# Altium PCB EnvUnitPCB.PcbDoc (part 2 of 4)
Units mm, origin at the board's own origin, x right, y up, seen from the top; angles counter-clockwise.
Board outline 110.5 x 67 mm, 4 copper layers (TOP, GND, VCC, BOT), stack 1.586 mm thick; 184 components, 135 nets, 655 pads, 1338 vias.
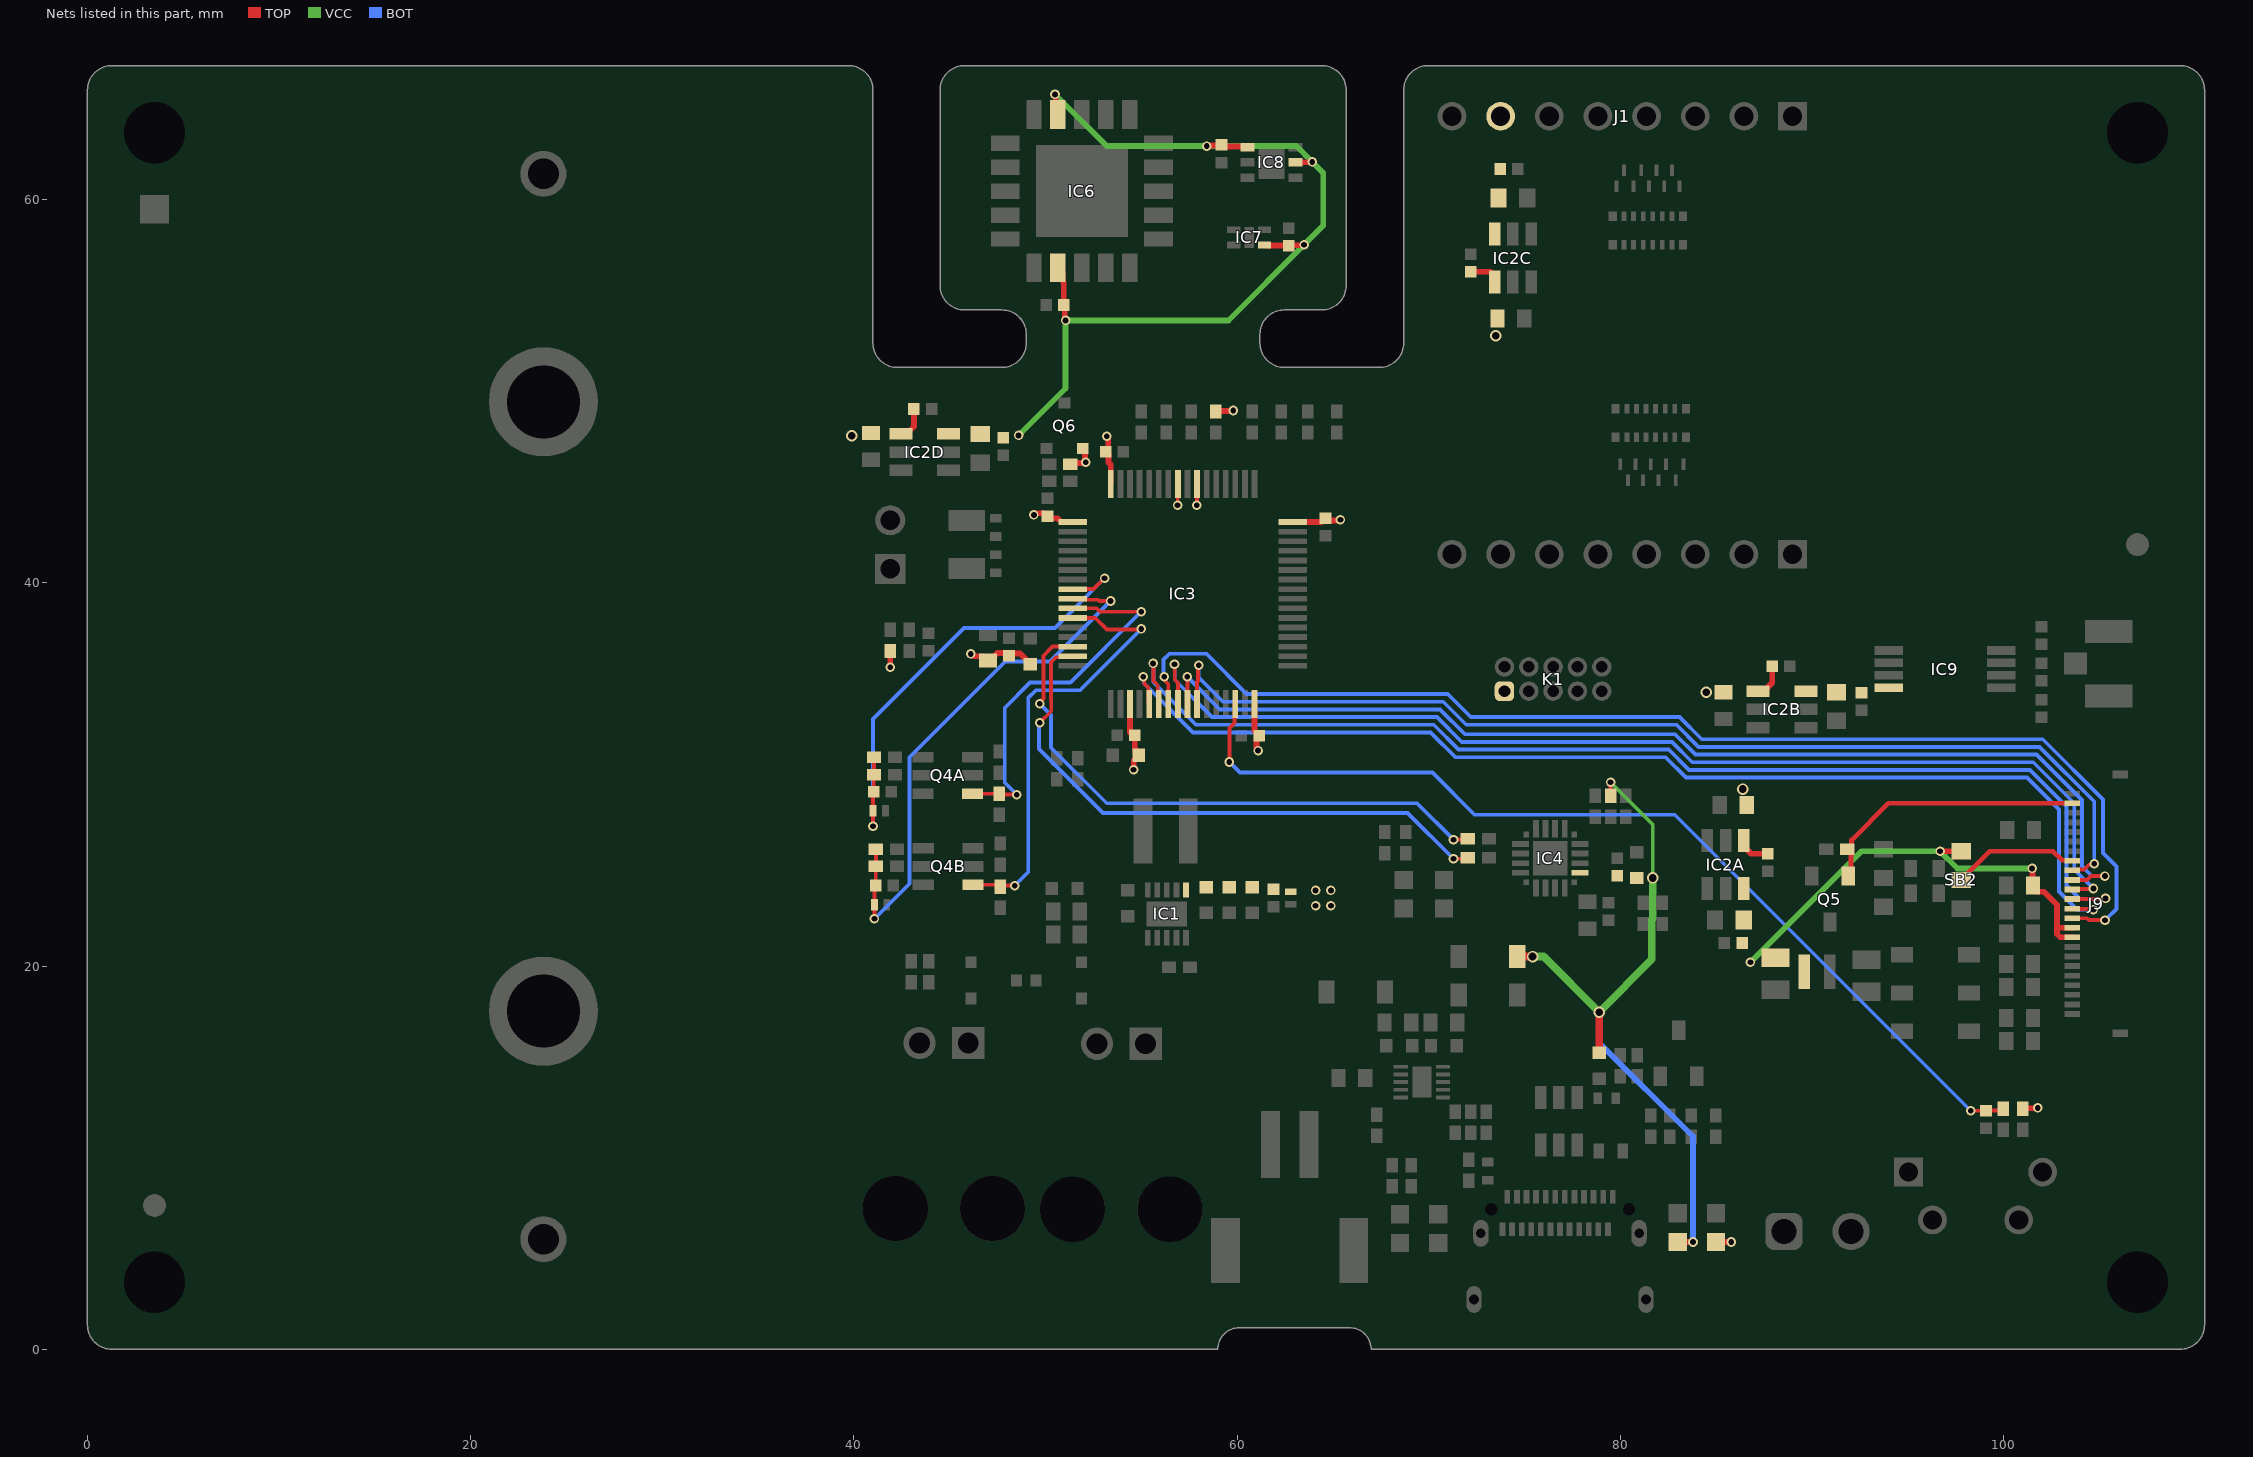
[diagram p4: the nets of this part, all layers, seen from the top]

## Part data
*BM1: library part MCH_00111, Manufacturer=LE, Active=1, Autor=JA, Cat1=Badmark, ComponentLink1Description="Manufacturer Web", ComponentLink1URL=http://www.logicelements.cz, Count=0, Designer=Krahulec, Generic_replacement=No, Jablotron_Price=0, LastRevisionDate=14.5.2018, LE_Price=0.000000, Librarian=Krahulec, Location=LE, PartNumber=MCH_00111, RoHS=1, Sourcing=None, Technology=NOP
*FD1 *FD2: library part MCH_00028, "Fiducial", Manufacturer=LE, Temperature_Max=125, Temperature_Min=-55, TemperatureRange=Military, Active=1, Autor="Lukas Krahulec", Cat1=Fiducial, ComponentLink1Description="Manufacturer Web", ComponentLink1URL=http://www.logicelements.cz, Designer="Lukas Krahulec", FIT=0, Generic_replacement=No, Jablotron_Price=0, LatestRevisionDate=25.6.2018, LE_Price=0, Librarian="Lukas Krahulec", Location=LE, PartNumber=MCH_00028, RoHS=1, Sourcing=None, Storage_Count=0, Technology=NOP
BT1: "Battery", Manufacturer_Name=Bulgin, Mouser Part Number=122-BX0036, Arrow Part Number=BX0036, Arrow Price/Stock=https://www.arrow.com/en/products/bx0036/bulgin-components-plc, Datasheet Link=https://www.bulgin.com/pdf/pdf.php?sku=BX0036, Height=25.1mm, Manufacturer_Part_Number=BX0036, Mouser Price/Stock=https://www.mouser.co.uk/ProductDetail/Bulgin/BX0036?qs=mZhjc5a7U8wkz32kfV3vfA%3D%3D
C1 C8A C8B C8C C8D C10 C11 C12 C13 C14 C18 C20 C21 C23 C24 C25 C29 C30 C39A C39B: library part GRM155R61A104KA01D, "Capacitor", Manufacturer_Name="Murata Electronics", Mouser Part Number=81-GRM155R61A104KA01, Arrow Part Number=GRM155R61A104KA01D, Arrow Price/Stock=https://www.arrow.com/en/products/grm155r61a104ka01d/murata-manufacturing?utm_currency=USD&region=europe, Datasheet Link=https://search.murata.co.jp/Ceramy/image/img/A01X/G101/ENG/GRM155R61A104KA01-02A.pdf, Height=0.7mm, Manufacturer_Part_Number=GRM155R61A104KA01D, Mouser Price/Stock=https://www.mouser.co.uk/ProductDetail/Murata-Electronics/GRM155R61A104KA01D?qs=5bAuhL3RhmNZw0v59AqOJA%3D%3D
C2 C3 C4 C5 C9 C19 C31 C34 C36: library part GRM188R61E106KA73D, "Capacitor", Manufacturer_Name="Murata Electronics", Mouser Part Number=81-GRM188R61E106KA3D, Arrow Part Number=GRM188R61E106KA73D, Arrow Price/Stock=https://www.arrow.com/en/products/grm188r61e106ka73d/murata-manufacturing?region=nac, Datasheet Link=https://search.murata.co.jp/Ceramy/image/img/A01X/G101/ENG/GRM188R61E106KA73-01A.pdf, Height=0.9mm, Manufacturer_Part_Number=GRM188R61E106KA73D, Mouser Price/Stock=https://www.mouser.co.uk/ProductDetail/Murata-Electronics/GRM188R61E106KA73D?qs=5aG0NVq1C4z8ebxPkQZf9A%3D%3D
C6A C6B C6C C6D C17: library part GRM188R61A105KA61D, "Capacitor", Manufacturer_Name="Murata Electronics", Mouser Part Number=81-GRM39R105K10, Arrow Part Number=GRM188R61A105KA61D, Arrow Price/Stock=https://www.arrow.com/en/products/grm188r61a105ka61d/murata-manufacturing?region=nac, Datasheet Link=https://search.murata.co.jp/Ceramy/image/img/A01X/G101/ENG/GRM188R61A105KA61-01A.pdf, Height=0.9mm, Manufacturer_Part_Number=GRM188R61A105KA61D, Mouser Price/Stock=https://www.mouser.co.uk/ProductDetail/Murata-Electronics/GRM188R61A105KA61D?qs=LlFn95tWfDgsujID1PD8Jw%3D%3D
C7A C7B C7C C7D: library part GRM155R61A102KA01D, "Capacitor", Manufacturer_Name="Murata Electronics", Mouser Part Number=81-GRM155R61A102KA1D, Arrow Part Number=GRM155R61A102KA01D, Arrow Price/Stock=https://www.arrow.com/en/products/grm155r61a102ka01d/murata-manufacturing?region=nac, Datasheet Link=https://search.murata.co.jp/Ceramy/image/img/A01X/G101/ENG/GRM155R61A102KA01-01A.pdf, Height=0.7mm, Manufacturer_Part_Number=GRM155R61A102KA01D, Mouser Price/Stock=https://www.mouser.co.uk/ProductDetail/Murata-Electronics/GRM155R61A102KA01D?qs=y02iAgv9n635dgph15ru9A%3D%3D
C15 C16: library part GCM1555C1H6R8BA16J, "Capacitor", Manufacturer_Name="Murata Electronics", Mouser Part Number=81-GCM1555C1H6R8BA6J, Datasheet Link=https://search.murata.co.jp/Ceramy/image/img/A01X/G101/ENG/GCM1555C1H6R8BA16-01A.pdf, Height=0.55mm, Manufacturer_Part_Number=GCM1555C1H6R8BA16J, Mouser Price/Stock=https://www.mouser.co.uk/ProductDetail/Murata-Electronics/GCM1555C1H6R8BA16J?qs=QzBtWTOodeUHvskaC%252BV70A%3D%3D
C22 C32 C33 C35 C37 C38: library part GRM188R61E475KE11J, "Capacitor", Manufacturer_Name="Murata Electronics", Mouser Part Number=81-GRM188R61E475KE1J, Arrow Part Number=GRM188R61E475KE11J, Arrow Price/Stock=https://www.arrow.com/en/products/grm188r61e475ke11j/murata-manufacturing, Datasheet Link=https://search.murata.co.jp/Ceramy/image/img/A01X/G101/ENG/GRM188R61E475KE11-01A.pdf, Height=0.9mm, Manufacturer_Part_Number=GRM188R61E475KE11J, Mouser Price/Stock=https://www.mouser.co.uk/ProductDetail/Murata-Electronics/GRM188R61E475KE11J?qs=hNud%2FORuBR3%2Fa9GLJFT8KA%3D%3D
C26 C27 C28: library part GRM1555C2A4R7WA01D, "Capacitor", Manufacturer_Name="Murata Electronics", Mouser Part Number=81-GRM1555C2A4R7WA1D, Datasheet Link=https://search.murata.co.jp/Ceramy/image/img/A01X/G101/ENG/GRM1555C2A4R7WA01-01A.pdf, Height=0.7mm, Manufacturer_Part_Number=GRM1555C2A4R7WA01D, Mouser Price/Stock=https://www.mouser.com/Search/Refine.aspx?Keyword=81-GRM1555C2A4R7WA1D
C40 C41: library part GRM21BR61H475KE51L, "Capacitor", Manufacturer_Name="Murata Electronics", Mouser Part Number=81-GRM21BR61H475KE1L, Arrow Part Number=GRM21BR61H475KE51L, Arrow Price/Stock=https://www.arrow.com/en/products/grm21br61h475ke51l/murata-manufacturing?region=nac, Datasheet Link=https://search.murata.co.jp/Ceramy/image/img/A01X/G101/ENG/GRM21BR61H475KE51-01A.pdf, Height=1.45mm, Manufacturer_Part_Number=GRM21BR61H475KE51L, Mouser Price/Stock=https://www.mouser.co.uk/ProductDetail/Murata-Electronics/GRM21BR61H475KE51L?qs=eeBpzGFlv%252B%252BOtLzDC1PY6Q%3D%3D
C42 C43 C44 C45 C46 C47 C48 C49: library part GRT188R61H105KE13D, "Capacitor", Manufacturer_Name="Murata Electronics", Mouser Part Number=81-GRT188R61H105KE3D, Arrow Part Number=GRT188R61H105KE13D, Arrow Price/Stock=https://www.arrow.com/en/products/grt188r61h105ke13d/murata-manufacturing?region=nac, Datasheet Link=https://search.murata.co.jp/Ceramy/image/img/A01X/G101/ENG/GRT188R61H105KE13-01A.pdf, Height=0.9mm, Manufacturer_Part_Number=GRT188R61H105KE13D, Mouser Price/Stock=https://www.mouser.co.uk/ProductDetail/Murata-Electronics/GRT188R61H105KE13D?qs=drgMNd%252BkGPNIxxtJByMGCg%3D%3D
C50 C51: library part GRM155R71H103KA88D, "Capacitor", Manufacturer_Name="Murata Electronics", Mouser Part Number=81-GRM155R71H103KA8D, Arrow Part Number=GRM155R71H103KA88D, Arrow Price/Stock=https://www.arrow.com/en/products/grm155r71h103ka88d/murata-manufacturing?utm_currency=USD&region=nac, Datasheet Link=https://search.murata.co.jp/Ceramy/image/img/A01X/G101/ENG/GRM155R71H103KA88-01A.pdf, Height=0.33mm, Manufacturer_Part_Number=GRM155R71H103KA88D, Mouser Price/Stock=https://www.mouser.co.uk/ProductDetail/Murata-Electronics/GRM155R71H103KA88D?qs=Dfh4SrgScWxOVlCuzd3ZyQ%3D%3D
CN1: library part MCD-03232, "USB_TypeC, 24 pins, RA, SMD, T=2.96mm (USB Certified 3.1)", Manufacturer="AMPHENOL ICC", Manufacturer_Part_Number=12401826E412A, Component_Country_Of_Origin=China°, ComponentLink1URL=http://tunmcdsvn.tun.st.com/Component_Documentation_Library/Trunk/Connector/AMPHEMOL_ICC_12401826E412A, ID=5348, Internal_Part_Number=MCD-03232, Order_Code_Digikey=12401826E412ATR-ND, Order_Code_Farnell=3727763, Order_Code_RS=N/A, Part_Preference=Recommended, Part_Type=Connector, ShowFields=YES, Status=Checked
D1 D11A D11B: "Diode ESD (Uni-directional)", Manufacturer_Name=LITTELFUSE, Mouser Part Number=576-SP3205-01ETG, Arrow Part Number=SP3205-01ETG, Arrow Price/Stock=https://www.arrow.com/en/products/sp3205-01etg/littelfuse?utm_currency=USD&region=nac, Datasheet Link=https://4donline.ihs.com/images/VipMasterIC/IC/LFSI/LFSI-S-A0010724013/LFSI-S-A0010724013-1.pdf?hkey=6D3A4C79FDBF58556ACFDE234799DDF0, Height=0.55mm, Manufacturer_Part_Number=SP3205-01ETG, Mouser Price/Stock=https://www.mouser.co.uk/ProductDetail/Littelfuse/SP3205-01ETG?qs=vHuUswq2%252BswfNhVD4WkB%252BQ%3D%3D
D2 D3: "TVS Diode (Uni-directional)", Manufacturer_Name=SEMTECH, Mouser Part Number=947-RCLAMP3328P.TZT, Arrow Part Number=RCLAMP3328P.TZT, Arrow Price/Stock=https://www.arrow.com/en/products/rclamp3328p.tzt/semtech?utm_currency=USD&region=europe, Datasheet Link=https://media.digikey.com/pdf/Data%20Sheets/Semtech%20PDFs/RCLAMP3328P.pdf, Height=0.525mm, Manufacturer_Part_Number=RCLAMP3328P.TZT, Mouser Price/Stock=https://www.mouser.co.uk/ProductDetail/Semtech/RCLAMP3328P.TZT?qs=rBWM4%252BvDhIeqoxUfuQEPWg%3D%3D
D6: "TVS Diode (Uni-directional)", Manufacturer_Name=STMicroelectronics, Mouser Part Number=511-ESDA25P35-1U1M, Arrow Part Number=ESDA25P35-1U1M, Arrow Price/Stock=https://www.arrow.com/en/products/esda25p35-1u1m/stmicroelectronics?utm_currency=USD&region=europe, Datasheet Link=https://www.st.com/resource/en/datasheet/esda25p35-1u1m.pdf, Height=0.6mm, Manufacturer_Part_Number=ESDA25P35-1U1M, Mouser Price/Stock=https://www.mouser.co.uk/ProductDetail/STMicroelectronics/ESDA25P35-1U1M?qs=aVyJF2WnouQUWqgNP85ZrA%3D%3D
D8 D9: "Schottky Diode", Manufacturer_Name="ROHM Semiconductor", Mouser Part Number=755-RB161MM-20TR, Datasheet Link=https://fscdn.rohm.com/en/products/databook/datasheet/discrete/diode/schottky_barrier/rb161mm-20tr-e.pdf, Height=0.9mm, Manufacturer_Part_Number=RB161MM-20TR, Mouser Price/Stock=https://www.mouser.co.uk/ProductDetail/ROHM-Semiconductor/RB161MM-20TR?qs=pXoXL5qUNJ0AtQ2ZS1W0NA%3D%3D
D10: "Schottky Diode", Manufacturer_Name="ROHM Semiconductor", Mouser Part Number=755-RB168MM-40TFTR, Datasheet Link=https://www.rohm.com/products/diodes/schottky-barrier-diodes/ultra-low-ir/rb168mm-40tf-product#productDetail, Height=0.9mm, Manufacturer_Part_Number=RB168MM-40TFTR, Mouser Price/Stock=https://www.mouser.co.uk/ProductDetail/ROHM-Semiconductor/RB168MM-40TFTR?qs=4v%252BiZTmLVHGRj2i7xya%2FtQ%3D%3D
D12 D13 D14: "Diode", Manufacturer_Name=onsemi, Mouser Part Number=863-MBR0530T1G, Arrow Part Number=MBR0530T1G, Arrow Price/Stock=https://www.arrow.com/en/products/mbr0530t1g/on-semiconductor?utm_currency=USD&region=europe, Datasheet Link=https://www.onsemi.com/pub/Collateral/MBR0530T1-D.PDF, Height=1.35mm, Manufacturer_Part_Number=MBR0530T1G, Mouser Price/Stock=https://www.mouser.co.uk/ProductDetail/onsemi/MBR0530T1G?qs=3JMERSakeboS%2FFOxJUMWeg%3D%3D
FB1 FB2: library part BLM18SG330SN1D, "Ferrite Bead", Manufacturer_Name="Murata Electronics", Mouser Part Number=81-BLM18SG330SN1D, Arrow Part Number=BLM18SG330SN1D, Arrow Price/Stock=https://www.arrow.com/en/products/blm18sg330sn1d/murata-manufacturing, Datasheet Link=http://www.murata.com/~/media/webrenewal/support/library/catalog/products/emc/emifil/c31e.ashx?la=en-gb, Height=0.95mm, Manufacturer_Part_Number=BLM18SG330SN1D, Mouser Price/Stock=https://www.mouser.co.uk/ProductDetail/Murata-Electronics/BLM18SG330SN1D?qs=7EBvPakHacUT88safgvlfQ%3D%3D
IC1: "Integrated Circuit", Manufacturer_Name="Texas Instruments", Mouser Part Number=595-TPS63900DSKR, Arrow Part Number=TPS63900DSKR, Arrow Price/Stock=https://www.arrow.com/en/products/tps63900dskr/texas-instruments?utm_currency=USD&region=nac, Datasheet Link=https://www.ti.com/lit/gpn/tps63900?HQS=ti-null-null-sf-df-pf-sep-wwe&DCM=yes, Height=0.8mm, Manufacturer_Part_Number=TPS63900DSKR, Mouser Price/Stock=https://www.mouser.co.uk/ProductDetail/Texas-Instruments/TPS63900DSKR?qs=zW32dvEIR3tSAmS5hXaH1Q%3D%3D
IC2A IC2B IC2C IC2D: "Integrated Circuit", Manufacturer_Name="Texas Instruments", Mouser Part Number=595-TPS22917DBVT, Arrow Part Number=TPS22917DBVT, Arrow Price/Stock=https://www.arrow.com/en/products/tps22917dbvt/texas-instruments?region=nac, Datasheet Link=http://www.ti.com/lit/gpn/TPS22917, Height=1.45mm, Manufacturer_Part_Number=TPS22917DBVT, Mouser Price/Stock=https://www.mouser.co.uk/ProductDetail/Texas-Instruments/TPS22917DBVT?qs=r5DSvlrkXmJUT8ENVsEqXw%3D%3D
IC3: "Integrated Circuit", Manufacturer_Name=STMicroelectronics, Datasheet Link=https://www.st.com/resource/en/datasheet/stm32u073cc.pdf, Height=1.6mm, Manufacturer_Part_Number=STM32U073RCT6
IC4: "Integrated Circuit", Manufacturer_Name="Silicon Labs", Mouser Part Number=634-CP2102NA02QFN20R, Arrow Part Number=CP2102N-A02-GQFN20R, Arrow Price/Stock=https://www.arrow.com/en/products/cp2102n-a02-gqfn20r/silicon-labs?utm_currency=USD&region=nac, Datasheet Link=https://www.silabs.com/documents/public/data-sheets/cp2102n-datasheet.pdf, Height=0.8mm, Manufacturer_Part_Number=CP2102N-A02-GQFN20R, Mouser Price/Stock=https://www.mouser.co.uk/ProductDetail/Silicon-Labs/CP2102N-A02-GQFN20R?qs=u16ybLDytRbf2uwPkMBdUg%3D%3D
IC5: "Integrated Circuit", Manufacturer_Name=STMicroelectronics, Mouser Part Number=511-USBLC6-2SC6, Arrow Part Number=USBLC6-2SC6, Arrow Price/Stock=https://www.arrow.com/en/products/usblc6-2sc6/stmicroelectronics?utm_currency=USD&region=europe, Datasheet Link=http://www.st.com/st-web-ui/static/active/en/resource/technical/document/datasheet/CD00050750.pdf, Height=1.45mm, Manufacturer_Part_Number=USBLC6-2SC6, Mouser Price/Stock=https://www.mouser.co.uk/ProductDetail/STMicroelectronics/USBLC6-2SC6?qs=po45yt2pPpu%2FhNIlwQdTlg%3D%3D
IC6: "Integrated Circuit", Manufacturer_Name=Sensirion, Mouser Part Number=403-SCD41-D-R2, Arrow Part Number=SCD41-D-R2, Arrow Price/Stock=https://www.arrow.com/en/products/scd41-d-r2/sensirion-ag?region=nac, Datasheet Link=https://cz.mouser.com/datasheet/2/682/Sensirion_CO2_Sensors_SCD4x_Datasheet-2010009.pdf, Height=6.8mm, Manufacturer_Part_Number=SCD41-D-R2, Mouser Price/Stock=https://www.mouser.co.uk/ProductDetail/Sensirion/SCD41-D-R2?qs=HBWAp0VN4Ri4o7ei4T3s0g%3D%3D
IC7: "Integrated Circuit", Manufacturer_Name=Sensirion, Mouser Part Number=403-SHT40-AD1B-R2, Arrow Part Number=SHT40-AD1B-R2, Arrow Price/Stock=https://www.arrow.com/en/products/sht40-ad1b-r2/sensirion-ag?utm_currency=USD&region=nac, Datasheet Link=https://www.mouser.dk/datasheet/2/682/Sensirion_10272020_Datasheet_SHT4x-1919523.pdf, Height=0.59mm, Manufacturer_Part_Number=SHT40-AD1B-R2, Mouser Price/Stock=https://www.mouser.co.uk/ProductDetail/Sensirion/SHT40-AD1B-R2?qs=zW32dvEIR3scTT6A4VuzaQ%3D%3D
IC8: "Integrated Circuit", Manufacturer_Name=Sensirion, Mouser Part Number=403-SGP40-D-R4, Arrow Part Number=SGP40-D-R4, Arrow Price/Stock=https://www.arrow.com/en/products/sgp40-d-r4/sensirion-ag?utm_currency=USD&region=nac, Datasheet Link=https://www.mouser.com/datasheet/2/682/Sensirion_Gas_Sensors_SGP40_Datasheet-1888696.pdf, Height=0.95mm, Manufacturer_Part_Number=SGP40-D-R4, Mouser Price/Stock=https://www.mouser.co.uk/ProductDetail/Sensirion/SGP40-D-R4?qs=yqaQSyyJnNgaRqiZfsbS1Q%3D%3D
IC9: "Integrated Circuit", Manufacturer_Name=STMicroelectronics, Mouser Part Number=511-ST25DV64KC-IE8T3, Arrow Part Number=ST25DV64KC-IE8T3, Arrow Price/Stock=https://www.arrow.com/en/products/st25dv64kc-ie8t3/stmicroelectronics?utm_currency=USD&region=nac, Datasheet Link=https://www.st.com/resource/en/datasheet/st25dv64kc.pdf, Height=1.2mm, Manufacturer_Part_Number=ST25DV64KC-IE8T3, Mouser Price/Stock=https://www.mouser.co.uk/ProductDetail/STMicroelectronics/ST25DV64KC-IE8T3?qs=QNEnbhJQKva4ZdUvGL0fuA%3D%3D
IC10: "Integrated Circuit", Manufacturer_Name="Texas Instruments", Mouser Part Number=595-BQ25185DLHR, Datasheet Link=https://www.ti.com/lit/ds/symlink/bq25185.pdf?ts=1706857561339&ref_url=https%253A%252F%252Fwww.ti.com%252Fproduct%252FBQ25185, Height=0.8mm, Manufacturer_Part_Number=BQ25185DLHR, Mouser Price/Stock=https://www.mouser.co.uk/ProductDetail/Texas-Instruments/BQ25185DLHR?qs=Z%252BL2brAPG1IbO%2FV3RqsaPw%3D%3D
J1 J2: "Connector", Manufacturer_Name=Harwin, Mouser Part Number=855-M20-7820842, Datasheet Link=https://cdn.harwin.com/pdfs/M20-782.pdf, Height=8.5mm, Manufacturer_Part_Number=M20-7820842, Mouser Price/Stock=https://www.mouser.co.uk/ProductDetail/Harwin/M20-7820842?qs=WS5Jv%252B%252Bx1qXOep0XOTvy2Q%3D%3D, system=Connector
J3: library part RECE-20279-001E-01, "Connector", Manufacturer_Name=Taoglas, Mouser Part Number=N/A, Manufacturer_Part_Number=RECE-20279-001E-01, Mouser Price/Stock=https://www.mouser.co.uk/ProductDetail/Taoglas/RECE-20279-001E-01?qs=WUa1z%2FNV9%252B3mVij1vDlP0A%3D%3D
J4: library part CMP-15831-000009-1, "CONN HEADER VERT 2POS 2.54MM", Current Rating=3A, Manufacturer=Harwin, Temperature="-40°C to +105°C", Temperature Range High=+105°C, Temperature Range Low=-40°C, Automotive=No, Category=Conn, ComponentLink2Description=Datasheet, ComponentLink2URL=https://cdn.harwin.com/pdfs/M20-999.pdf, Conn Gender=Male, Conn Orientation=Vertical, Contact Material=Tin,Nickel, Device Class L1=Connectors, Device Class L2="Headers and Wire Housings", Device Class L3=unset, Digikey Description="CONN HEADER VERT 2POS 2.54MM", Height=8.99mm, Lead Free=Yes, Manufacturer Part Number=M20-9990246, Mouser Description="2.54mm (0.1\") Pitch SIL Vertical PC Tail Pin Header, 6.1mm mating pin height, tin, 2 contacts", Number of Contacts=2, Number of Rows=1, Octopart=https://octopart.com/m20-9990246-harwin-2590635, Package=M20-9990246, Pitch=2.54mm, RoHS=TRUE
J5: library part CMP-1502-02464-2, Color="Blue, Green", Current=10A, Max Operating Temperature=105°C, Min Operating Temperature=-40°C, Voltage=300V, Contact Material=Brass, Contact Plating="Brass, Tin", Current Rating=10A, Height=8.7mm, Housing Material=Nylon, Lead Pitch=3.5mm, Length=7.4mm, Mount="Through Hole", NexarPartId=18818288, Number of Contacts=2, Number of Levels=1, Number of Pins=2, Number of Positions Per Level=2, Number of Rows=1, Packaging=Box, Pitch=3.5052mm, Plating="Brass, Steel", REACH SVHC=Unknown, RoHS=Compliant, Stripping Length=-6mm, Termination=Screw, Voltage Rating=300V, Width=7.9mm, Wire Gauge (Max)=24AWG, Wire Gauge (Min)=16AWG, Wire/Cable Gauge=24AWG
J6 J8: library part CMP-04776-000016-1, "CONN HEADER R/A 2POS 2.54MM", Current Rating=3A, Manufacturer=Molex, Package=HDR2, Temperature="-40°C to +105°C", Temperature Range High=+105°C, Temperature Range Low=-40°C, Voltage Rating=250V, Automotive=No, Category=Conn, ComponentLink2Description=Datasheet, ComponentLink2URL=https://www.molex.com/webdocs/datasheets/pdf/en-us/0705510036_PCB_HEADERS.pdf, Conn Gender=Male, Conn Orientation="Right Angle", Contact Material=Gold,Nickel, Device Class L1=Connectors, Device Class L2="Headers and Wire Housings", Device Class L3=unset, Digikey Description="CONN HEADER R/A 2POS 2.54MM", Footprint Url=https://www.molex.com/pdm_docs/sd/705510036_sd.pdf, Height=7.12mm, Lead Free=Yes, Manufacturer Part Number=70551-0001, Mouser Description="Connector Shrouded Header 2 Position 2.54mm Solder Right Angle Thru-Hole Tube", Number of Contacts=2, Number of Rows=1, Octopart=https://octopart.com/70551-0036-molex-773165, Pitch=2.54mm, RoHS=TRUE, Standoff Height=0.25mm
J7: "Connector", Manufacturer_Name=Adafruit, Mouser Part Number=485-1769, Arrow Part Number=1769, Arrow Price/Stock=https://www.arrow.com/en/products/1769/adafruit-industries?utm_currency=USD&region=nac, Datasheet Link=https://cdn-shop.adafruit.com/datasheets/17311.pdf, Height=5.5mm, Manufacturer_Part_Number=1769, Mouser Price/Stock=https://www.mouser.co.uk/ProductDetail/Adafruit/1769?qs=GURawfaeGuBbgoGtf2XstA%3D%3D
J9: "Connector", Manufacturer_Name="Amphenol Communications Solutions", Mouser Part Number=649-311A7H121024E200, Arrow Part Number=F3311A7H121024E200, Arrow Price/Stock=https://www.arrow.com/en/products/f3311a7h121024e200/amphenol-fci?region=nac, Datasheet Link=https://cdn.amphenol-cs.com/media/wysiwyg/files/documentation/datasheet/flex/ffc_fpc_050mm_f331.pdf, Height=1.12mm, Manufacturer_Part_Number=F3311A7H121024E200, Mouser Price/Stock=https://www.mouser.co.uk/ProductDetail/Amphenol-ICC-Aorora/F3311A7H121024E200/?qs=DPoM0jnrROXxrFUCHSrvbQ%3D%3D
K1: library part TEST_00015, "Cortex ARM JTAG 10 Pin, Header", Manufacturer="CNC Tech", Supplier Part Number 1=1175-1627-ND, Active=1, Autor=Krutina, Cat1=JTAG, Cat2=ARM, ComponentLink1Description="Manufacturer Web", ComponentLink1URL=http://www.cnctech.us/, Count=585, Designer=Krahulec, Generic_replacement=No, ID=15, Jablotron_Price=0, LastRevisionDate=28.7.2015, LE_Price=0.363527, Librarian=Krahulec, Location=LE, Manufacturer Part Number=3220-10-0100-00, PartNumber=TEST_00015, RoHS=1, Sourcing=Manufacturer, Supplier 1=Digi-Key, Technology=THT, Validated in design=0
L1: library part CMP-2000-05090-4, "INDUCTOR, 2.2UH, 8A, 20%, 38MHZ, REEL", Case/Package=SMD/SMT, DC Resistance (DCR)=23.5mR, Inductance Tolerance=20%, Max DC Current=8A, Max Operating Temperature=125°C, Min Operating Temperature=-40°C, Saturation Current=3.1A, Self Resonant Frequency=38MHz, Test Frequency=100kHz, Core Material=Composite, Height=2.1mm, Inductance=2.2uH, Lead Free="Contains Lead", Length=4.3mm, Mount="Surface Mount", Packaging="Tape and Reel", REACH SVHC="No SVHC", RMS Current (Irms)=8A, RoHS Compliant=Yes, Series=XFL4020, Shielding=Shielded, Termination=SMD/SMT, Tolerance=20%, Width=4.3mm
L2: library part CMP-01768-06743366-1, "EPL2010-103MLC Power inductor, shielded, 20% tol, SMT, RoHS", Ambient Temperature Range High=85°C, Case/Package=0808, DC Resistance (DCR)=1Ω, Inductance=10µH, Max DC Current=495mA, Min Operating Temperature=-40°C, Saturation Current=200mA, Self Resonant Frequency=33MHz, Test Frequency=100kHz, Tolerance=20%, Core Material=Ferrite, Height=1.05mm, Lead Free="Contains Lead", Length=2.2mm, Lifecycle Status=Production, Max Operating Temperature=85°C, NexarPartId=6743366, RMS Current (Irms)=495mA, RoHS=Compliant, Series Resistance=1Ω, Shielding=Shielded, Termination=SMD/SMT, Width=2.2mm
LED1 LED2 LED6: "LED", Manufacturer_Name="Wurth Elektronik", Mouser Part Number=710-150060GS75000, Datasheet Link=https://componentsearchengine.com/Datasheets/2/150060GS75000.pdf, Height=0.8mm, Manufacturer_Part_Number=150060GS75000, Mouser Price/Stock=https://www.mouser.co.uk/ProductDetail/Wurth-Elektronik/150060GS75000?qs=LlUlMxKIyB0UYkq5lDO8nA%3D%3D
LED3: "LED", Manufacturer_Name="Wurth Elektronik", Mouser Part Number=710-150060YS75000, Datasheet Link=http://uk.rs-online.com/web/p/products/8154219, Height=0.8mm, Manufacturer_Part_Number=150060YS75000, Mouser Price/Stock=https://www.mouser.co.uk/ProductDetail/Wurth-Elektronik/150060YS75000?qs=LlUlMxKIyB0nKmwefHgtZw%3D%3D
LED4 LED5: library part 150060RS55040, "LED", Manufacturer_Name="Wurth Elektronik", Manufacturer_Part_Number=150060RS75000, Mouser Part Number=710-150060RS75000, Datasheet Link=https://componentsearchengine.com/Datasheets/2/150060GS75000.pdf, Height=0.8mm, Mouser Price/Stock=https://www.mouser.co.uk/ProductDetail/Wurth-Elektronik/150060GS75000?qs=LlUlMxKIyB0UYkq5lDO8nA%3D%3D
MH1 MH2 MH3 MH4: library part MCH_00037, "(Mount Hole 3.2mm)", Manufacturer=LE, Temperature_Max=125, Temperature_Min=-55, TemperatureRange=Military, Active=1, Autor="Lukas Krahulec", Cat1="Mounting Holes", Cat2=Non-Plated, Cat3="3.2 mm", ComponentLink1Description="Manufacturer Web", ComponentLink1URL=http://www.logicelements.cz, Designer="Lukas Krahulec", FIT=0, Generic_replacement=No, Jablotron_Price=0, LatestRevisionDate=24.2.2020, LE_Price=0, Librarian="Lukas Krahulec", Location=LE, PartNumber=MCH_00037, RoHS=1, Sourcing=None, Storage_Count=0, Technology=NOP
Q1 Q5: "MOSFET (N-Channel)", Manufacturer_Name=onsemi, Mouser Part Number=512-BSS138, Arrow Part Number=BSS138, Arrow Price/Stock=https://www.arrow.com/en/products/bss138/on-semiconductor?utm_currency=USD&region=europe, Datasheet Link=https://www.onsemi.com/pub/Collateral/BSS138-D.PDF, Height=1.2mm, Manufacturer_Part_Number=BSS138, Mouser Price/Stock=https://www.mouser.co.uk/ProductDetail/onsemi-Fairchild/BSS138?qs=HK%252BeIG1iaahCeqBvjB4arg%3D%3D
Q2 Q3 Q6: "MOSFET (P-Channel)", Manufacturer_Name=Toshiba, Mouser Part Number=757-SSM3J358RLF, Arrow Part Number=SSM3J358R,LF, Arrow Price/Stock=https://www.arrow.com/en/products/ssm3j358rlf/toshiba?region=nac, Datasheet Link=https://toshiba.semicon-storage.com/ap-en/product/mosfet/detail.SSM3J358R.html, Height=0.88mm, Manufacturer_Part_Number=SSM3J358R,LF, Mouser Price/Stock=https://www.mouser.co.uk/ProductDetail/Toshiba/SSM3J358RLF?qs=HXFqYaX1Q2xwvCtt1GGmkw%3D%3D
Q4A Q4B: "Transistor", Manufacturer_Name=Vishay, Mouser Part Number=781-SI3552DV-GE3, Arrow Part Number=SI3552DV-T1-GE3, Arrow Price/Stock=https://www.arrow.com/en/products/si3552dv-t1-ge3/vishay?region=nac, Datasheet Link=https://componentsearchengine.com/Datasheets/2/SI3552DV-T1-GE3.pdf, Height=1.1mm, Manufacturer_Part_Number=SI3552DV-T1-GE3, Mouser Price/Stock=https://www.mouser.co.uk/ProductDetail/Vishay-Semiconductors/SI3552DV-T1-GE3?qs=kt16UJ73eEF%2FUgkYQb5Vew%3D%3D
R1: library part RP0402BRD0736K5L, "Resistor", Arrow Part Number=RT0402FRE07100KL, Manufacturer_Name=KEMET, Mouser Part Number=603-RT0402FRE07100KL, Arrow Price/Stock=https://www.arrow.com/en/products/rt0402fre07100kl/yageo, Datasheet Link=https://cz.mouser.com/datasheet/2/447/PYu_RP_51_RoHS_L_3-3461456.pdf, Height=0.35mm, Manufacturer_Part_Number=RP0402BRD0736K5L, Mouser Price/Stock=https://www.mouser.co.uk/ProductDetail/YAGEO/RT0402FRE07100KL?qs=BXCcY9r%252B08CxTvf5JB1kiw%3D%3D
R2A R2B R2C R2D: library part ESR03EZPF1000, "Resistor", Manufacturer_Name="ROHM Semiconductor", Mouser Part Number=755-ESR03EZPF1000, Datasheet Link=https://componentsearchengine.com//ESR03EZPF1000.pdf, Height=0.55mm, Manufacturer_Part_Number=ESR03EZPF1000, Mouser Price/Stock=https://www.mouser.co.uk/ProductDetail/ROHM-Semiconductor/ESR03EZPF1000?qs=493kPxzlxfJdLkJZpX4ByA%3D%3D
R3 R25 R38A R38B R43: library part RT0402FRE07100KL, "Resistor", Manufacturer_Name=KEMET, Mouser Part Number=603-RT0402FRE07100KL, Arrow Part Number=RT0402FRE07100KL, Arrow Price/Stock=https://www.arrow.com/en/products/rt0402fre07100kl/yageo, Datasheet Link=https://www.yageo.com/upload/media/product/productsearch/datasheet/rchip/PYu-RT_1-to-0.01_RoHS_L_11.pdf, Height=0.35mm, Manufacturer_Part_Number=RT0402FRE07100KL, Mouser Price/Stock=https://www.mouser.co.uk/ProductDetail/YAGEO/RT0402FRE07100KL?qs=BXCcY9r%252B08CxTvf5JB1kiw%3D%3D
R4 R5 R17 R18: library part RT0402FRE075K1L, "Resistor", Manufacturer_Name=YAGEO, Datasheet Link=https://www.yageo.com/upload/media/product/app/datasheet/rchip/pyu-rt_1-to-0.01_rohs_l.pdf, Height=0.35mm, Manufacturer_Part_Number=RT0402FRE075K1L, Mouser Part Number=RT0402FRE075K1L, Mouser Price/Stock=https://www.mouser.co.uk/ProductDetail/YAGEO/RT0402FRE07100RL?qs=BXCcY9r%252B08AcvLZjF7vcwQ%3D%3D
R6 R7 R8 R10 R12 R13 R14 R15 R21 R23 R26 R27 R28: library part RT0402FRE071KL, "Resistor", Arrow Part Number=RT0402FRE07100KL, Manufacturer_Name=KEMET, Arrow Price/Stock=https://www.arrow.com/en/products/rt0402fre07100kl/yageo, Datasheet Link=https://www.yageo.com/upload/media/product/productsearch/datasheet/rchip/PYu-RT_1-to-0.01_RoHS_L_11.pdf, Height=0.35mm, Manufacturer_Part_Number=RT0402FRE071KL, Mouser Part Number=RT0402FRE071KL, Mouser Price/Stock=https://www.mouser.co.uk/ProductDetail/YAGEO/RT0402FRE07100KL?qs=BXCcY9r%252B08CxTvf5JB1kiw%3D%3D
R9 R39A R39B R45: library part RC0402BR-07100KL, "Resistor", Manufacturer_Name=YAGEO, Datasheet Link=https://cz.mouser.com/datasheet/2/447/PYu_RC_Group_51_RoHS_L_12-3368608.pdf, Height=0.4mm, Manufacturer_Part_Number=RC0402BR-07100KL
R11 R22 R41A R41B R47: library part RC0402BR-07330KL, "Resistor", Manufacturer_Name=YAGEO, Datasheet Link=https://cz.mouser.com/datasheet/2/447/PYu_RC_Group_51_RoHS_L_11-1984063.pdf, Height=0.4mm, Manufacturer_Part_Number=RC0402BR-07330KL
R16 R24 R29 R30 R31 R32 R33 R40A R40B R46: library part RC0402FR-071ML, "Resistor", Manufacturer_Name=YAGEO, Mouser Part Number=603-RC0402FR-071ML, Arrow Part Number=RC0402FR-071ML, Arrow Price/Stock=https://www.arrow.com/en/products/rc0402fr-071ml/yageo?region=nac, Datasheet Link=https://componentsearchengine.com/Datasheets/2/RC0402FR-071ML.pdf, Height=0.4mm, Manufacturer_Part_Number=RC0402FR-071ML, Mouser Price/Stock=https://www.mouser.co.uk/ProductDetail/YAGEO/RC0402FR-071ML?qs=V1yeUXFNrknfoI4987wfBQ%3D%3D
R19 R20 R34 R37 R48 R49: library part RT0402FRE0710KL, "Resistor", Arrow Part Number=RT0402FRE07100KL, Manufacturer_Name=KEMET, Mouser Part Number=603-RT0402FRE0710KL, Arrow Price/Stock=https://www.arrow.com/en/products/rt0402fre07100kl/yageo, Datasheet Link=https://cz.mouser.com/datasheet/2/447/PYu_RT_1_to_0_01_RoHS_L_15-3461507.pdf, Height=0.35mm, Manufacturer_Part_Number=RT0402FRE0710KL, Mouser Price/Stock=https://www.mouser.co.uk/ProductDetail/YAGEO/RT0402FRE07100KL?qs=BXCcY9r%252B08CxTvf5JB1kiw%3D%3D
R35: library part RT0402BRD07604RL, "Resistor", Arrow Part Number=RT0402BRD0713KL, Manufacturer_Name=KEMET, Mouser Part Number=603-RT0402BRD0713KL, Arrow Price/Stock=https://www.arrow.com/en/products/rt0402brd0713kl/yageo, Datasheet Link=https://cz.mouser.com/datasheet/2/447/PYu_RT_1_to_0_01_RoHS_L_15-3461507.pdf, Height=0.35mm, Manufacturer_Part_Number=RT0402BRD07604RL, Mouser Price/Stock=https://www.mouser.com/Search/Refine.aspx?Keyword=603-RT0402BRD0713KL
R36: library part RT0402BRD0713KL, "Resistor", Manufacturer_Name=KEMET, Mouser Part Number=603-RT0402BRD0713KL, Arrow Part Number=RT0402BRD0713KL, Arrow Price/Stock=https://www.arrow.com/en/products/rt0402brd0713kl/yageo, Datasheet Link=https://www.yageo.com/upload/media/product/productsearch/datasheet/rchip/PYu-RT_1-to-0.01_RoHS_L_12.pdf, Height=0.35mm, Manufacturer_Part_Number=RT0402BRD0713KL, Mouser Price/Stock=https://www.mouser.com/Search/Refine.aspx?Keyword=603-RT0402BRD0713KL
R42: library part ERJ-3BQFR47V, "Resistor", Manufacturer_Name=Panasonic, Mouser Part Number=667-ERJ-3BQFR47V, Datasheet Link=http://industrial.panasonic.com/cdbs/www-data/pdf/RDN0000/AOA0000C313.pdf, Manufacturer_Part_Number=ERJ-3BQFR47V, Mouser Price/Stock=https://www.mouser.co.uk/ProductDetail/Panasonic/ERJ-3BQFR47V?qs=vIi9VVzGal8PcLrBRduGlQ%3D%3D
R44: library part ERJ-3RQF3R0V, "Resistor", Manufacturer_Name=Panasonic, Mouser Part Number=667-ERJ-3RQF3R0V, Datasheet Link=http://industrial.panasonic.com/cdbs/www-data/pdf/RDN0000/AOA0000C313.pdf, Manufacturer_Part_Number=ERJ-3RQF3R0V, Mouser Price/Stock=https://www.mouser.co.uk/ProductDetail/Panasonic/ERJ-3RQF3R0V?qs=KH2o3k57USiq02y4kowEUQ%3D%3D
RN1 RN2: library part EXB-U2H102JV, "Resistor Network (16-Pin)", Manufacturer_Name=Panasonic, Mouser Part Number=667-EXB-U2H102JV, Arrow Part Number=EXB-U2H102JV, Arrow Price/Stock=null?region=nac, Datasheet Link=https://industrial.panasonic.com/cdbs/www-data/pdf/AOC0000/AOC0000C20.pdf, Height=0.55mm, Manufacturer_Part_Number=EXB-U2H102JV, Mouser Price/Stock=https://www.mouser.co.uk/ProductDetail/Panasonic/EXB-U2H102JV?qs=Z3CaLxJiOJIxUASPpxcvBQ%3D%3D
S1: "Switch", Manufacturer_Name="Wurth Elektronik", Mouser Part Number=710-431256038716, Datasheet Link=https://www.we-online.com/components/products/datasheet/431256038716.pdf, Height=7.2mm, Manufacturer_Part_Number=431256038716, Mouser Price/Stock=https://www.mouser.co.uk/ProductDetail/Wurth-Elektronik/431256038716?qs=2kOmHSv6VfR5N0FN9BhJ6g%3D%3D
Y1: library part ECS-.327-6-34RR-TR, "Crystal or Oscillator", Manufacturer_Name=ECS, Mouser Part Number=520-.327-6-34RRT, Arrow Part Number=ECS-.327-6-34RR-TR, Arrow Price/Stock=https://www.arrow.com/en/products/ecs-.327-6-34rr-tr/ecs-international?region=nac, Datasheet Link=https://ecsxtal.com/store/pdf/ECX-34RR.pdf, Height=0mm, Manufacturer_Part_Number=ECS-.327-6-34RR-TR, Mouser Price/Stock=https://www.mouser.co.uk/ProductDetail/ECS/ECS-.327-6-34RR-TR?qs=Mv7BduZupUhhqbPNycFzzw%3D%3D

## Via types
v1: diameter 0.5, hole 0.3, TOP to BOT, tented both sides, 1301 vias
v2: diameter 0.6, hole 0.4, TOP to BOT, tented both sides, 37 vias

## Nets (pads, with @x,y where several pads share a name; then routed paths per layer and width w, separated by ;. In a path a pad name is that pad's centre, name@x,y a point inside that pad or via, vN(x,y) a via of type N, cw(c..) or ccw(c..) an arc to the next point about the centre after c; other vN are vias at no path point)
3V3: C1.2 C2.1 C3.1 C4.1 C6A.2 C6B.2 C6C.2 C6D.2 C7A.2 C7B.2 C7C.2 C7D.2 C9.1 C10.2 C11.2 C12.2 C13.2 C14.2 C17.2 C18.2 D1.1 FB1.1 IC1.6 IC2A.1 IC2B.1 IC2C.1 IC2D.1 IC3.1 IC3.19 IC3.32 IC3.48 IC3.55 IC3.57 IC3.64 K1.1 LED5.2 Q6.2 R16.1 R22.2 R25.1 R47.2 | length 31.9
  TOP w0.2: v1(56.9,44.05) 56.907,44.057 56.907,45.155 IC3.57@56.915,45.163 ; v1(57.9,44.05) 57.907,44.057 57.907,45.155 IC3.55@57.915,45.163
  TOP w0.3: v1(41.9,35.6) R25.1@41.9,36.45 ; IC2D.1@42.45,47.775 42.75,47.775 43.14,48.165 C7D.2@43.14,49.075 ; v1(46.1,36.296) 46.154,36.296 46.275,36.175 46.775,36.175 C17.2@47,35.95 ; C17.2@47.095,35.95 47.486,36.341 47.939,36.341 48.09,36.19 C18.2@48.1,36.19 48.228,36.318 48.684,36.318 49,36.002 49,35.925 49.175,35.75 FB1.1@49.2,35.75 ; v1(49.4,43.55) 49.493,43.643 49.947,43.643 50.211,43.379 50.635,43.379 50.839,43.175 IC3.1@51.427,43.175 ; R16.1@51.3,46.2 51.362,46.262 52.062,46.262 v1(52.1,46.3) 52.062,46.338 52.062,46.9 Q6.2@51.95,47.012 ; v1(53.2,47.65) 53.2,47.596 53.274,47.522 53.274,46.984 C12.2@53.14,46.85 53.29,46.7 53.29,46.29 53.415,46.165 IC3.64@53.415,45.163 ; IC3.19@54.415,33.687 54.415,32.195 C13.2@54.66,31.95 ; v1(54.6,30.25) 54.616,30.266 54.616,30.716 54.782,30.882 C9.1@54.782,30.993 ; C13.2@54.66,32.05 C13.2@54.66,31.95 ; C13.2@54.7,31.91 C13.2@54.66,31.95 ; C9.1@54.875,31 54.7,31.175 54.7,31.336 54.66,31.376 C13.2@54.66,31.95 ; R22.2@58.9,48.95 58.925,48.975 59.775,48.975 v1(59.8,49) ; IC3.32@60.915,33.687 60.915,32.266 61.121,32.06 C11.2@61.121,32.05 ; v1(61.1,31.25) 61.1,31.304 61.023,31.381 61.023,31.895 C11.2@61.149,32.022 ; IC3.48@62.903,43.175 64.406,43.175 64.618,43.387 C14.2@64.628,43.387 64.761,43.253 65.299,43.253 65.346,43.3 v1(65.4,43.3) ; C7C.2@72.2,56.24 73.219,56.24 73.451,56.008 IC2C.1@73.451,55.708 ; LED5.2@85,5.6 v1(85.8,5.6) ; IC2A.1@86.45,26.55 86.45,26.25 86.84,25.86 C7A.2@87.7,25.86 ; IC2B.1@87.2,34.35 87.5,34.35 87.94,34.79 87.94,35.55 C7B.2@88.04,35.65 ; R47.2@101,12.55 101.025,12.575 101.775,12.575 v1(101.8,12.6)
  other v1: 64.1,23.15 64.9,23.15 64.1,23.95 64.9,23.95
  other v2: 86.4,29.243 84.5,34.3 39.9,47.675 73.5,52.9
3V3_EINK: C8A.2 C41.1 C43.1 IC2A.6 J9.15 J9.16 L2.1 R2A.2 SB2.2 | length 24.6
  TOP w0.3: v1(96.7,26) SB2.2@97.8,26 ; v1(101.5,25.1) 101.525,25.075 101.525,24.225 C43.1@101.55,24.2 101.55,24.109 101.775,23.884 102.116,23.884 102.8,23.2 102.8,22 ; J9.16@103.7,21.5 102.976,21.5 102.8,21.676 102.8,22 ; J9.15@103.7,22 102.8,22
  VCC w0.3: v1(86.8,20.2) 92.6,26 v1(96.7,26) 97.6,25.1 v1(101.5,25.1)
3V3_NFC: C8B.2 IC2B.6 IC9.8 R2B.2
3V3_RF: C8C.2 IC2C.6 J1.7 R2C.2
3V3_SENS: C8D.2 C23.2 C24.2 C25.2 IC2D.6 IC6.7 IC6.19 IC7.3 IC8.1 IC8.5 R2D.2 | length 49.9
  TOP w0.3: IC6.19@50.475,64.375 50.538,64.438 50.538,65.462 v1(50.5,65.5) ; IC6.7@50.65,56.45 50.9,56.2 50.9,55.734 50.96,55.674 C23.2@50.96,54.5 51.014,54.446 51.014,53.742 v1(51.052,53.704) ; v1(58.425,62.8) 58.455,62.83 59.17,62.83 C25.2@59.2,62.86 ; C25.2@59.33,62.78 60.52,62.78 IC8.1@60.55,62.75 ; IC7.3@61.56,57.616 62.674,57.616 C24.2@62.7,57.59 62.73,57.62 63.47,57.62 v1(63.5,57.65) ; IC8.5@63.05,61.95 63.062,61.962 63.912,61.962 v1(63.924,61.974)
  VCC w0.3: v1(48.6,47.7) 51.052,50.152 v1(51.052,53.704) 51.056,53.7 59.55,53.7 v1(63.5,57.65) 64.5,58.65 64.5,61.399 63.949,61.95 v1@63.924,61.95 ; v1(50.5,65.5) 53.2,62.8 v1(58.425,62.8) 63.099,62.8 v1(63.924,61.974)
+5V: C19.1 C20.2 D9.2 FB2.2 IC4.7 LED6.2 R9.1 | length 37.2
  TOP w0.2: R9.1@79.5,28.9 v1(79.5,29.6)
  TOP w0.3: LED6.2@83,5.55 83.05,5.6 v1(83.8,5.6)
  TOP w0.4: D9.2@74.625,20.5 v2(75.425,20.5) ; FB2.2@78.9,15.475 v2(78.9,17.6)
  VCC w0.2: v1(79.5,29.6) 81.7,27.4 v2(81.7,24.6)
  VCC w0.4: v2(75.425,20.5) 76,20.5 v2(78.9,17.6) 81.65,20.35 81.65,22.423 81.7,22.473 v2(81.7,24.6)
  BOT w0.3: v2(78.9,17.6) 78.9,16 83.8,11.1 v1(83.8,5.6)
BAT_ANA: C39A.2 D11A.1 IC3.8 R39A.2 R41A.2 | length 26.3
  TOP w0.2: v1(41,27.3) D11A.1@41,28.1 41,29.06 C39A.2@41.04,29.1 41.04,29.99 R41A.2@41.05,30 R39A.2@41.05,30.9 ; IC3.8@51.427,39.675 52.517,39.675 v1(53.089,40.247)
  BOT w0.2: v1(41,27.3) 41,32.9 45.75,37.65 50.492,37.65 v1(53.089,40.247)
BAT_ANB: C39B.2 D11B.1 IC3.9 R39B.2 R41B.2 | length 28.7
  TOP w0.2: v1(41.075,22.475) D11B.1@41.075,23.2 41.075,24.135 C39B.2@41.14,24.2 41.14,25.19 R41B.2@41.15,25.2 R39B.2@41.15,26.1 ; IC3.9@51.427,39.175 51.477,39.125 52.182,39.125 52.75,39.125 52.818,39.057 v1(53.4,39.057)
  BOT w0.2: v1(41.075,22.475) 41.95,23.35 42.9,24.3 42.9,30.9 47.9,35.9 50.243,35.9 v1(53.4,39.057)
BAT_CTRA: IC3.10 Q4A.1 R40A.2 | length 20
  TOP w0.2: Q4A.1@46.2,29 R40A.2@47.6,29 47.65,28.95 v1(48.5,28.95) ; IC3.10@51.427,38.675 52.666,38.675 52.841,38.5 v1(55,38.5)
  BOT w0.2: v1(48.5,28.95) 47.875,29.575 47.875,33.475 49.2,34.8 51.3,34.8 v1(55,38.5)
BAT_CTRB: IC3.11 Q4B.1 R40B.2 | length 23.6
  TOP w0.2: Q4B.1@46.225,24.25 47.55,24.25 R40B.2@47.65,24.15 47.7,24.2 v1(48.4,24.2) ; IC3.11@51.427,38.175 52.6,38.175 53.214,37.561 54.961,37.561 v1(55,37.6)
  BOT w0.2: v1(48.4,24.2) 49.1,24.9 49.1,34 49.5,34.4 51.8,34.4 v1(55,37.6)
BS: J9.8 SB2.1 | length 6.8
  TOP w0.25: SB2.1@97.8,24.5 97.875,24.5 98.175,24.8 98.175,24.875 99.3,26 102.59,26 103.065,25.525 103.675,25.525 J9.8@103.7,25.5
BUSY: IC3.26 J9.9 | length 56.6
  TOP w0.2: IC3.26@57.915,33.687 57.915,34.837 57.965,34.887 57.965,35.665 v1(58,35.7) ; J9.9@103.7,25 103.75,25.05 104.224,25.05 104.464,25.289 104.689,25.289 v1(104.747,25.347)
  BOT w0.2: v1(58,35.7) 57.989,35.689 57.989,35.077 59.266,33.8 70.763,33.8 71.963,32.6 82.934,32.6 84.091,31.443 101.891,31.443 104.747,28.588 v1(104.747,25.347)
BUTTON: C29.2 IC3.30 R23.1 | length 51.1
  TOP w0.2: v1(59.6,30.654) 59.6,32.427 59.865,32.692 59.865,33.637 IC3.30@59.915,33.687 ; v1(98.3,12.45) 99.09,12.45 C29.2@99.1,12.46 99.91,12.46 R23.1@100,12.55
  BOT w0.2: v1(59.6,30.654) 60.154,30.1 70.2,30.1 72.4,27.9 82.85,27.9 v1(98.3,12.45)
CS: IC3.22 J9.12 | length 61.7
  TOP w0.2: v1(55.621,35.8) 55.65,35.771 55.65,34.872 55.865,34.657 55.865,33.737 IC3.22@55.915,33.687 ; J9.12@103.7,23.5 105.3,23.5 v1(105.333,23.533)
  BOT w0.2: v1(55.621,35.8) 55.65,35.771 55.65,34.816 57.866,32.6 70.266,32.6 71.566,31.3 82.537,31.3 83.594,30.243 101.394,30.243 103.3,28.337 103.3,24.2 104,23.5 105.3,23.5 v1(105.333,23.533)
DBG_RX: IC3.15 R6.1 | length 30.8
  TOP w0.2: v1(49.7,32.7) 50.301,33.301 50.301,33.901 50.3,35.86 50.565,36.125 51.377,36.125 IC3.15@51.427,36.175 ; v1(71.3,25.6) 72,25.6 R6.1@72.05,25.65
  BOT w0.2: v1(49.7,32.7) 49.659,32.659 49.659,31.341 53,28 68.9,28 v1(71.3,25.6)
DBG_TX: IC3.14 R8.1 | length 30.6
  TOP w0.2: v1(49.7,33.7) 49.7,33.767 49.9,33.967 49.9,36.2 50.375,36.675 IC3.14@51.427,36.675 ; v1(71.3,26.6) 72,26.6 R8.1@72.05,26.65
  BOT w0.2: v1(49.7,33.7) 50.3,33.1 50.3,31.4 53.2,28.5 69.4,28.5 v1(71.3,26.6)
DC: IC3.24 J9.11 | length 58.4
  TOP w0.2: v1(56.739,35.75) 56.75,35.739 56.75,34.95 56.915,34.785 IC3.24@56.915,33.687 ; J9.11@103.7,24 103.725,24.025 104.675,24.025 v1(104.7,24.05)
  BOT w0.2: v1(56.739,35.75) 56.75,35.739 56.75,34.95 58.7,33 70.431,33 71.731,31.7 82.703,31.7 83.76,30.643 101.56,30.643 103.7,28.503 103.7,25.05 v1(104.7,24.05)
DIN: IC3.23 J9.14 | length 63.2
  TOP w0.2: v1(56.2,35.1) 56.257,35.043 56.257,34.877 56.415,34.719 IC3.23@56.415,33.687 ; J9.14@103.7,22.5 104.372,22.5 104.472,22.4 105.299,22.4 v1(105.307,22.392)
  BOT w0.2: v1(56.2,35.1) 56.171,35.129 56.171,35.996 56.474,36.3 58.4,36.3 60.5,34.2 71,34.2 72.2,33 83.1,33 84.257,31.843 102.057,31.843 105.2,28.7 105.2,25.9 105.9,25.2 105.9,22.985 v1(105.307,22.392)
EPD_RST: IC3.25 J9.10 | length 57.3
  TOP w0.2: v1(57.4,35.1) 57.407,35.093 57.407,33.694 IC3.25@57.415,33.687 ; J9.10@103.7,24.5 104.372,24.5 104.572,24.7 v1(105.3,24.7)
  BOT w0.2: v1@57.413,35.087 59.1,33.4 70.597,33.4 71.897,32.1 82.869,32.1 83.926,31.043 101.726,31.043 104.1,28.669 104.1,25.216 104.616,24.7 v1(105.3,24.7)
EPD_SCK: IC3.21 J9.13 | length 59.9
  TOP w0.2: v1(55.1,35.1) 55.157,35.043 55.157,34.756 55.365,34.549 55.365,33.737 IC3.21@55.415,33.687 ; J9.13@103.7,23 103.725,22.975 104.675,22.975 v1(104.7,22.95)
  BOT w0.2: v1(55.1,35.1) 55.139,35.061 55.139,34.761 57.7,32.2 70.1,32.2 71.4,30.9 82.372,30.9 83.429,29.843 101.229,29.843 102.9,28.172 102.9,23.9 103.85,22.95 v1(104.7,22.95)
GDR: J9.2 Q5.1 R43.2 | length 14.6
  TOP w0.25: Q5.1@91.9,24.7 92.051,24.851 92.051,25.925 91.876,26.1 R43.2@91.85,26.1 91.903,26.1 92.078,26.275 92.078,26.578 94,28.5 J9.2@103.7,28.5